# Altium PCB board_v1.0.PcbDoc
Units mm, origin at the board's own origin, x right, y up, seen from the top; angles counter-clockwise.
Board outline 49 x 8 mm, 2 copper layers (Top Layer, Bottom Layer); 19 components, 15 nets, 74 pads, 34 vias.
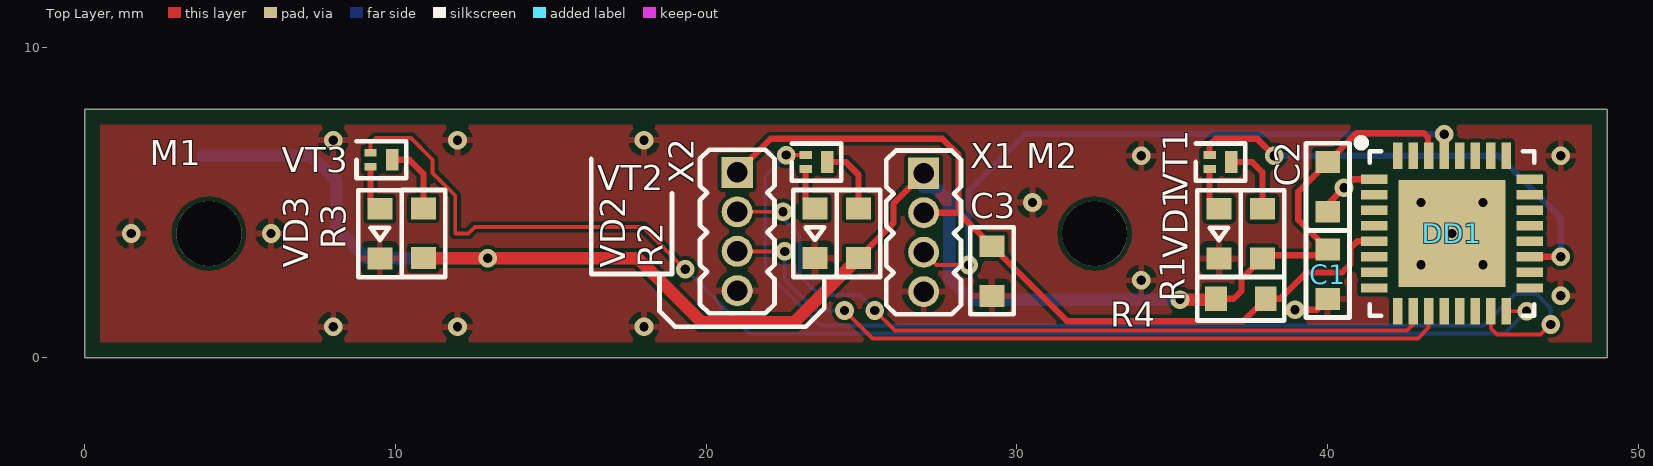
[diagram p0: Top Layer view]
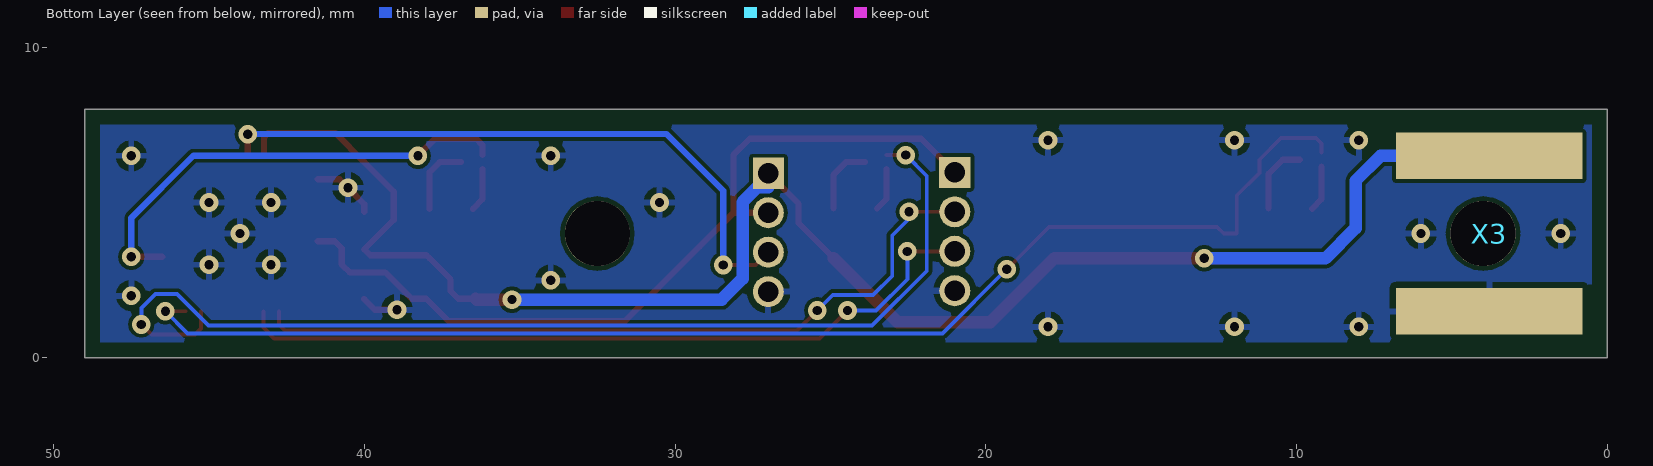
[diagram p1: Bottom Layer view, seen from below]

## Layer stack, top to bottom
Top Solder: solder mask 0.0102, Solder Resist, Dk 3.5
Top Layer: signal copper 0.0356
Dielectric 1: dielectric 0.32, FR-4, Dk 4.8
Bottom Layer: signal copper 0.0356
Bottom Solder: solder mask 0.0102, Solder Resist, Dk 3.5

## Board outline
0,0 49,0 49,8 0,8

## Design rules (kind name [scope] priority, off if disabled: settings)
Clearance [All] p1: gap=0.125 ignorepadtopadclearanceinfootprint=FALSE
ComponentClearance ComponentClearance_1 [InComponent('M1') vs InComponent('X3')] p1: gap=0 collisioncheckmode=3 verticalgap=0 showdistances=FALSE
ComponentClearance [All] p2: gap=0.1 collisioncheckmode=3 verticalgap=0.1 showdistances=FALSE
DiffPairsRouting [All] p1: maxlimit=10 minlimit=0.125 mostfreqgap=0.125 toplayer_minwidth=0.125 toplayer_maxwidth=2 toplayer_prefwidth=0.125 bottomlayer_minwidth=0.125 bottomlayer_maxwidth=2 bottomlayer_prefwidth=0.125 maxuncoupledlength=12.7
PlaneClearance [All] p1: clearance=0.5
PlaneConnect [All] p1: planeconnectstyle=Relief reliefexpansion=0.4 reliefentries=4 reliefconductorwidth=0.2 reliefairgap=0.2
PolygonConnect [All] p1: connectstyle=Relief reliefconductorwidth=0.2 reliefentries=4 polygonreliefangle="90 Angle" airgapwidth=0.2
RoutingCorners [All] p1: cornerstyle=45-Degree minsetback=1 maxsetback=1
RoutingVias [All] p1: holewidth=0.3 width=0.6 viastyle="Through Hole" minholewidth=0.3 minwidth=0.6 maxholewidth=5 maxwidth=7
SolderMaskExpansion [All] p1: expansion=0.1
UnRoutedNet [All] p1: checkbadconnections=TRUE
Width [All] p1: maxlimit=6 minlimit=0.125 preferedwidth=0.2
24 further rules are at their usual default settings.

## Components (designator, comment, footprint, x,y, rotation, side; value= is the part's Value field where it differs from the comment)
C1 "0.1uF" C0603 40,2.7 r270 top
C2 "0.1uF" C0603 40,5.51 r270 top
C3 "2.2n" C0603 29.2,2.8 r270 top
DD1 "MSP430F2132IRxx" "QFN-32 5x5 0.5" 44,4 r0 top
M1 "MountHoleEmpty" "MountHole 2mm Empty" 4,4 r0 top
M2 "MountHoleEmpty" "MountHole 2mm Empty" 32.5,4 r0 top
R1 "100" R0603 37.9,3.99 r90 top
R2 "100" R0603 24.9,4 r90 top
R3 "100" R0603 10.9,4 r90 top
R4 "47k" R0603 37.2,1.9 r0 top
VD1 "LED" LED0603 36.5,3.99 r90 top
VD2 "LED" LED0603 23.5,4 r90 top
VD3 "LED" LED0603 9.5,3.99 r90 top
VT1 "BC847BM" SOT-883 36.55,6.3 r0 top
VT2 "BC847BM" SOT-883 23.55,6.3 r0 top
VT3 "BC847BM" SOT-883 9.55,6.375 r0 top
X1 "SBW-4" PLL-1-4 27,5.94 r0 top
X2 "PLL-1-4" PLL-1-4 21,5.97 r0 top
X3 "POWER_PINS" POWER_PINS 3.8,4 r180 bottom

## Footprints (in the part's own frame and the unit in brackets; to place one, negate y for a bottom-side part, rotate by r counter-clockwise, add the part's x,y. Pads: shape width x height; smd on the part's side, far side on the other; paste and mask are expansions set on the pad)
C0603 [mm]
  rect 0.7x0.8 smd: 1(-0.79,0) 2(0.81,0)
  silkscreen extent -1.4,-0.7 1.4,0.7, body extent -0.8,-0.4 0.8,0.4, height 0.3
LED0603 [mm]
  rect 0.7x0.8 smd: 1(-0.79,0) 2(0.81,0)
  silkscreen extent -1.4,-0.7 1.4,0.7, body extent -0.82,-0.37 0.83,0.36, height 0.68
"MountHole 2mm Empty" [mm] "Mouting hole without metallization"
  round 2.1 hole 2.1: 1(0,0)
  body extent -1.9,-1.9 1.9,1.9, height 1.1
PLL-1-4 [mm]
  rect 1x1 hole 0.65: 1(0,0)
  round 1 hole 0.65: 2(0,-1.27) 3(0,-2.54) 4(0,-3.81)
  silkscreen extent -1.2,-4.54 1.2,0.73, body extent -1.2,-4.45 1.2,0.63, height 5
POWER_PINS [mm]
  rect 6x1.5 smd: 1(0,2.5) 2(0,-2.5)
"QFN-32 5x5 0.5" [mm] "QFN, 32-Leads, Body 5,00x5,00mm, Pitch 0,50mm, Thermal Pad 3,45x3,45mm, IPC Medium Density"
  rect 0.85x0.3 smd: 1(-2.5,1.75) 2(-2.5,1.25) 3(-2.5,0.75) 4(-2.5,0.25) 5(-2.5,-0.25) 6(-2.5,-0.75) 7(-2.5,-1.25) 8(-2.5,-1.75) 17(2.5,-1.75) 18(2.5,-1.25) 19(2.5,-0.75) 20(2.5,-0.25) 21(2.5,0.25) 22(2.5,0.75) 23(2.5,1.25) 24(2.5,1.75)
  rect 0.3x0.85 smd: 9(-1.75,-2.5) 10(-1.25,-2.5) 11(-0.75,-2.5) 12(-0.25,-2.5) 13(0.25,-2.5) 14(0.75,-2.5) 15(1.25,-2.5) 16(1.75,-2.5) 25(1.75,2.5) 26(1.25,2.5) 27(0.75,2.5) 28(0.25,2.5) 29(-0.25,2.5) 30(-0.75,2.5) 31(-1.25,2.5) 32(-1.75,2.5)
  rect 3.45x3.45 smd: 33(0,0)
  silkscreen extent -3.05,-2.65 2.65,3.05, body extent -2.5,-2.5 2.5,2.5, height 0.9
R0603 [mm]
  rect 0.7x0.8 smd: 1(-0.79,0) 2(0.81,0)
  silkscreen extent -1.4,-0.7 1.4,0.7, body extent -0.85,-0.4 0.85,0.4, height 0.56
SOT-883 [mm] "SOT-883 SMD package"
  rect 0.4x0.25 smd: 1(-0.35,0.225) 2(-0.35,-0.225)
  rect 0.4x0.7 smd: 3(0.35,0)
  silkscreen extent -0.8,-0.6 0.8,0.6, body extent -0.49,-0.29 0.49,0.29, height 0.48

## Part data
C1 C2 C3: library part C
DD1: "TI 16bit MCU MSP430 series"
M1 M2: "Mounting hole without metallization"
R1 R2 R3 R4: library part R
VD1 VD2 VD3: "SMD LED"
VT1 VT2 VT3: "SOT-883 bipolar transistor hfe=290"
X1: "TI MSP430 SpyByWire connector"
X2: "1.27mm pin header"
X3: "On board power pins"

## Via types
v1: diameter 0.6, hole 0.3, Top Layer to Bottom Layer, tented both sides, 29 vias
v2: diameter 0.6, hole 0.3, Top Layer to Bottom Layer, tented bottom, 5 vias

## Nets (pads, with @x,y where several pads share a name; then routed paths per layer and width w, separated by ;. In a path a pad name is that pad's centre, name@x,y a point inside that pad or via, vN(x,y) a via of type N, cw(c..) or ccw(c..) an arc to the next point about the centre after c; other vN are vias at no path point)
3V3: C1.1 C2.1 DD1.30 R1.1 R2.1 R3.1 R4.1 X1.1 X3.1 | length 55.9
  Top Layer w0.2: R2.1 26.025,4.335 26.025,4.965 X1.1 ; R4.1 36.975,1.9 37.225,2.15 37.225,2.525 R1.1 38,3.3 39.81,3.3 C1.1 39.05,4.44 39.05,5.35 C2.1 40.925,7.225 43.1,7.225 43.225,7.1 43.225,6.525 DD1.30
  Top Layer w0.4: R3.1 17.79,3.21 19.85,1.15 22.84,1.15 R2.1 ; v1(35.25,1.875) 36.385,1.875 R4.1
  Bottom Layer w0.4: X3.1 7.3,6.5 8.1,5.7 8.1,4.175 9.075,3.2 v1(12.975,3.2) ; X1.1 27,5.495 27.342,5.495 27.825,5.012 27.825,3.058 27.825,2.55 28.5,1.875 v1(35.25,1.875)
CLK: DD1.29 X1.3 | length 20.8
  Top Layer w0.125: X1.3 27.411,2.989 v1(28.45,2.989)
  Top Layer w0.2: v1@43.725,7.173 v1(43.752,7.2) 43.752,6.502 DD1.29
  Bottom Layer w0.2: v1(28.45,2.989) 28.45,5.375 30.275,7.2 v1(43.752,7.2)
DIO: C3.1 DD1.5 R4.2 X1.2 X2.1 | length 27
  Top Layer w0.2: X2.1 22.08,7.05 27.6,7.05 28.12,6.53 28.12,4.67 ; X1.2 28.12,4.67 ; DD1.5 40.95,3.75 40.725,3.525 40.725,3 40.475,2.75 39.325,2.75 38.475,1.9 R4.2 37.285,1.175 31.615,1.175 C3.1 28.12,4.67
GND: C1.2 C2.2 C3.2 DD1.1 DD1.33 VD1.1 VD2.1 VD3.1 X1.4 X2.4 X3.2 | length 3.3
  Top Layer w0.2: v1(38.95,1.55) 39.66,1.55 C1.2 ; C2.2 40,4.95 v1(40.525,5.475) 40.8,5.75 DD1.1
  other v1: 8,1 12,1 18,1 47.5,2 34,2.5 1.5,4 6,4 30.5,5 34,6.5 47.5,6.5 8,7 12,7 18,7
  other v2: 43,3 45,3 44,4 43,5 45,5
I2C_CLK: DD1.11 X2.3 | length 24.6
  Top Layer w0.125: X2.3 21.005,3.425 v1(22.525,3.425) ; v1(24.45,1.525) 25.35,0.625 42.9,0.625 43.25,0.975 DD1.11
  Bottom Layer w0.125: v1(22.525,3.425) 22.525,2.529 23.529,1.525 v1(24.45,1.525)
I2C_SDA: DD1.10 X2.2 | length 24.7
  Top Layer w0.125: X2.2 v1(22.475,4.7) ; v1(25.425,1.525) 26.075,0.875 42.55,0.875 42.75,1.075 DD1.10
  Bottom Layer w0.125: v1(22.475,4.7) 22.475,4.475 23.013,3.937 23.013,2.637 23.625,2.025 24.925,2.025 v1(25.425,1.525)
LED1_EN: DD1.19 VT1.1 | length 15
  Top Layer w0.2: VT1.1 36.2,6.85 36.4,7.05 37.725,7.05 v1(38.275,6.5) ; DD1.19 v1(47.5,3.25)
  Bottom Layer w0.2: v1(38.275,6.5) 45.5,6.5 47.5,4.5 v1(47.5,3.25)
LED2_EN: DD1.15 VT2.1 | length 34.5
  Top Layer w0.125: v1(22.575,6.525) VT2.1 ; DD1.15 45.25,0.95 45.45,0.75 46.85,0.75 v1(47.175,1.075)
  Bottom Layer w0.125: v1(22.575,6.525) 21.9,5.85 21.9,2.8 23.663,1.037 45.012,1.037 46.025,2.05 46.725,2.05 47.175,1.6 v1(47.175,1.075)
LED3_EN: DD1.16 VT3.1 | length 42.3
  Top Layer w0.125: VT3.1 9.2,6.9 9.375,7.075 10.5,7.075 11.2,6.375 11.2,5.95 11.925,5.225 11.925,4 12.343,4 12.556,4.213 17.962,4.213 v1(19.325,2.85) ; DD1.16 v1(46.4,1.5)
  Bottom Layer w0.125: v1(19.325,2.85) 19.338,2.85 21.4,0.787 45.687,0.787 v1(46.4,1.5)
NetR1_2: R1.2 VT1.3 | length 2.3
  Top Layer w0.2: VT1.3 37.575,6.3 37.9,5.975 R1.2
NetR2_2: R2.2 VT2.3 | length 2.3
  Top Layer w0.2: VT2.3 24.5,6.3 24.9,5.9 R2.2
NetR3_2: R3.2 VT3.3 | length 2.3
  Top Layer w0.2: VT3.3 10.45,6.375 10.9,5.925 R3.2
NetVD1_2: VD1.2 VT1.2 | length 1.4
  Top Layer w0.2: VT1.2 36.2,5.1 VD1.2
NetVD2_2: VD2.2 VT2.2 | length 1.4
  Top Layer w0.2: VT2.2 23.2,5.11 VD2.2
NetVD3_2: VD3.2 VT3.2 | length 1.5
  Top Layer w0.2: VT3.2 9.2,5.1 VD3.2
pads on no net: DD1.2 DD1.3 DD1.4 DD1.6 DD1.7 DD1.8 DD1.9 DD1.12 DD1.13 DD1.14 DD1.17 DD1.18 DD1.20 DD1.21 DD1.22 DD1.23 DD1.24 DD1.25 DD1.26 DD1.27 DD1.28 DD1.31 DD1.32 M1.1 M2.1

## Polygon pours and split planes (outlines as drawn)
GND on Top Layer "Top Layer-GND" (solid, pour order 0): 0.5,7.5 0.5,0.5 48.5,0.5 48.5,7.5
GND on Bottom Layer "Bottom Layer-GND" (solid, pour order 2): 0.5,7.5 0.5,0.5 48.5,0.5 48.5,7.5

## Silkscreen, mask and mechanical layers (free items; w line width, h text height)
Top Overlay:
  lines w0.15: 16.3,6.4 16.3,2.7 18.9,2.7 18.9,5.3 ; 18.5,2.7 18.5,1.5 19,1 23.2,1 23.8,1.6 23.8,2.6
Mechanical 1:
  lines w0.15: 4.485,2.06 cw(c4,4) 4.485,5.94 ; 4.5,2 4.5,1 6,1 6,7 4.5,7 4.5,6 ; 32.985,2.06 cw(c32.5,4) 32.985,5.94 ; 33,2 33,1 34.5,1 34.5,7 33,7 33,6 ; 0,0 0,8 49,8 49,0 0,0